# Altium PCB input.PcbDoc
Units mm, origin at the board's own origin, x right, y up, seen from the top; angles counter-clockwise.
Board outline 42 x 44 mm, 2 copper layers (Top Layer, Bottom Layer), stack 1.57 mm thick; 43 components, 24 nets, 128 pads, 46 vias.
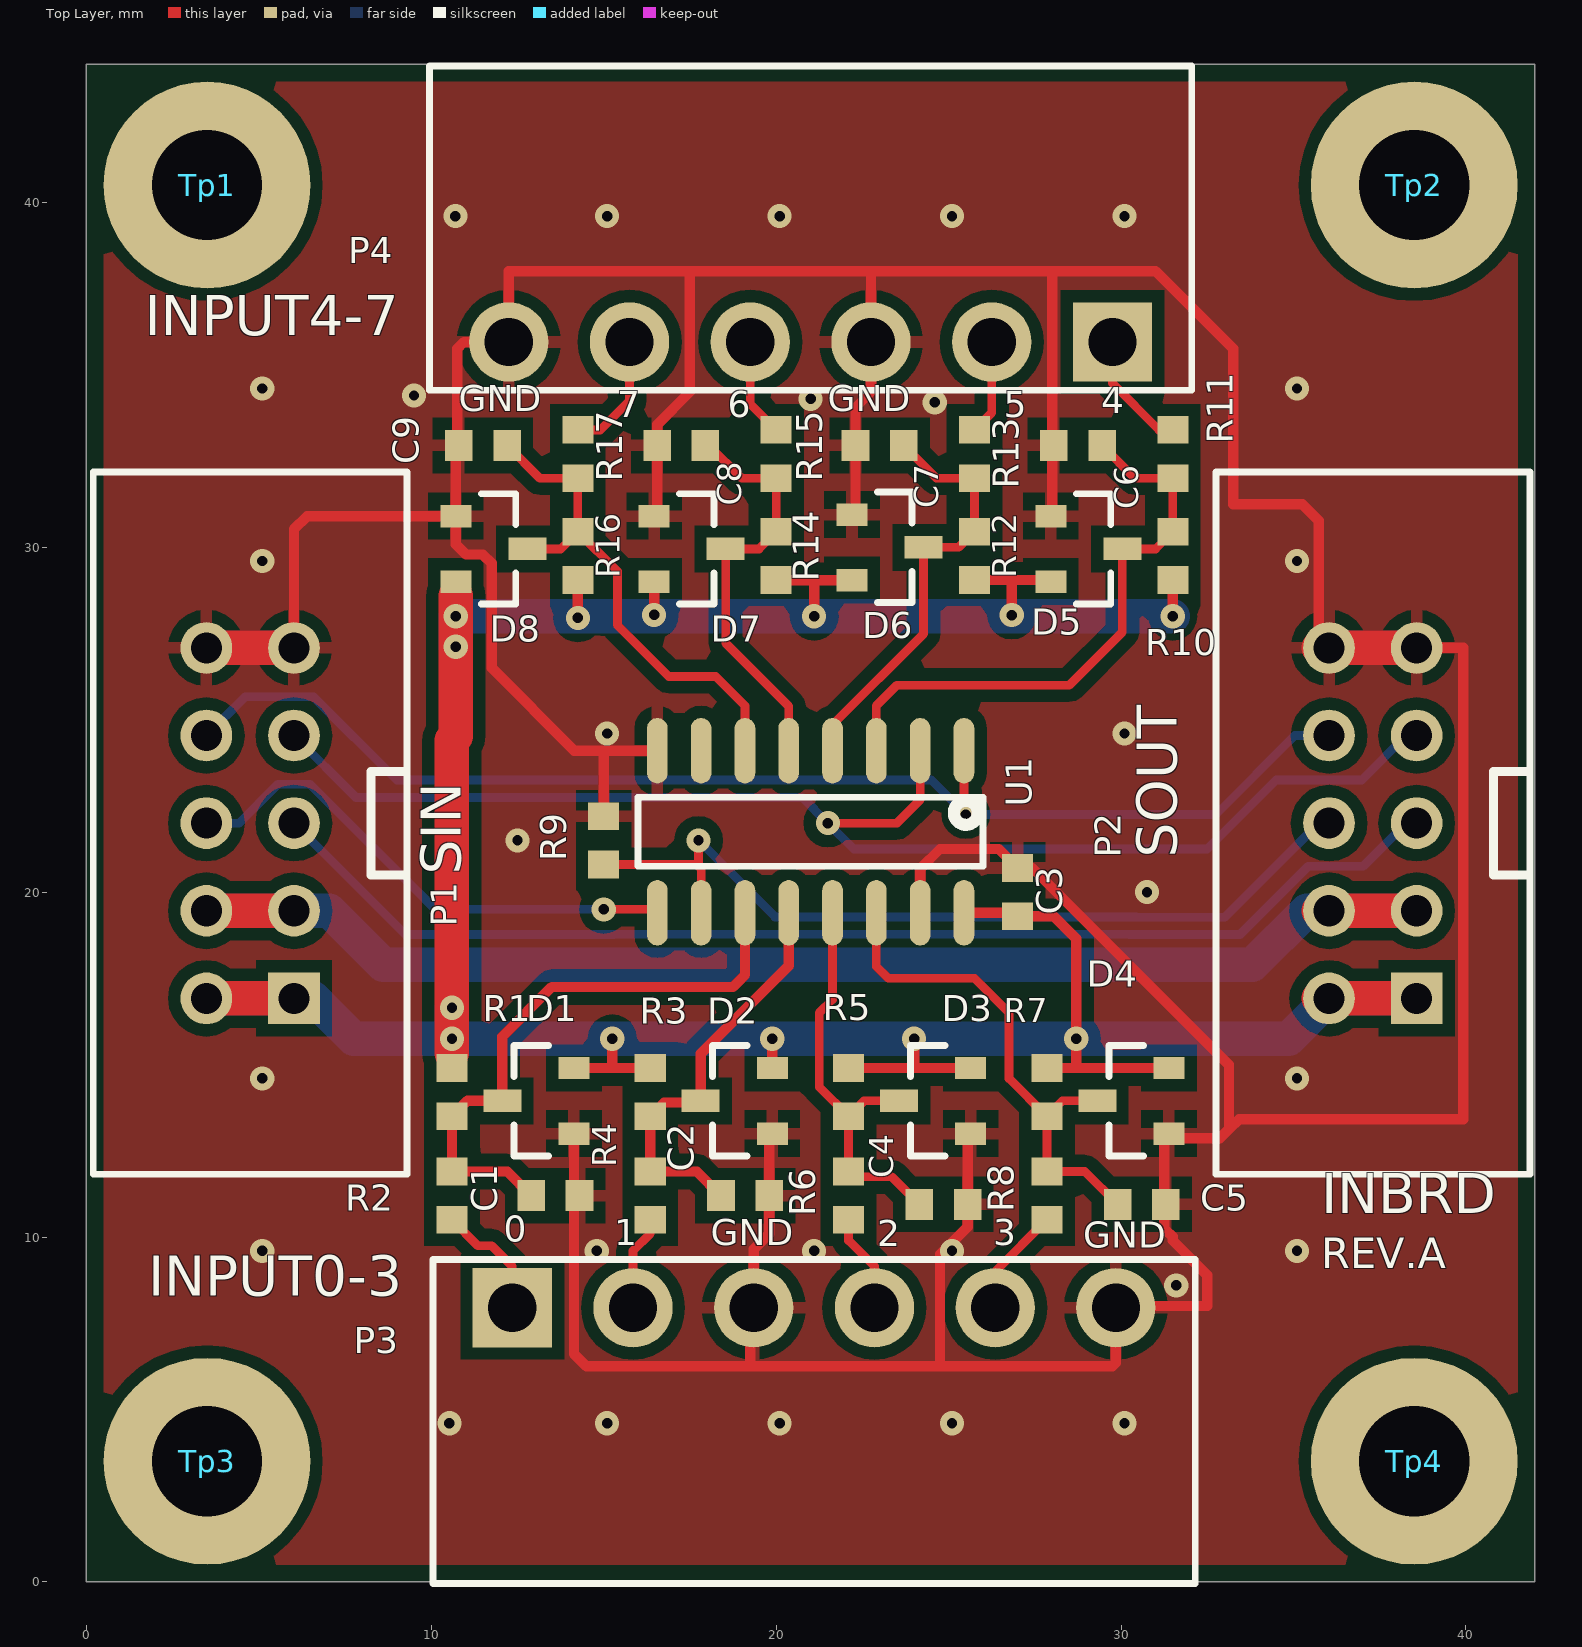
[diagram p0: Top Layer view]
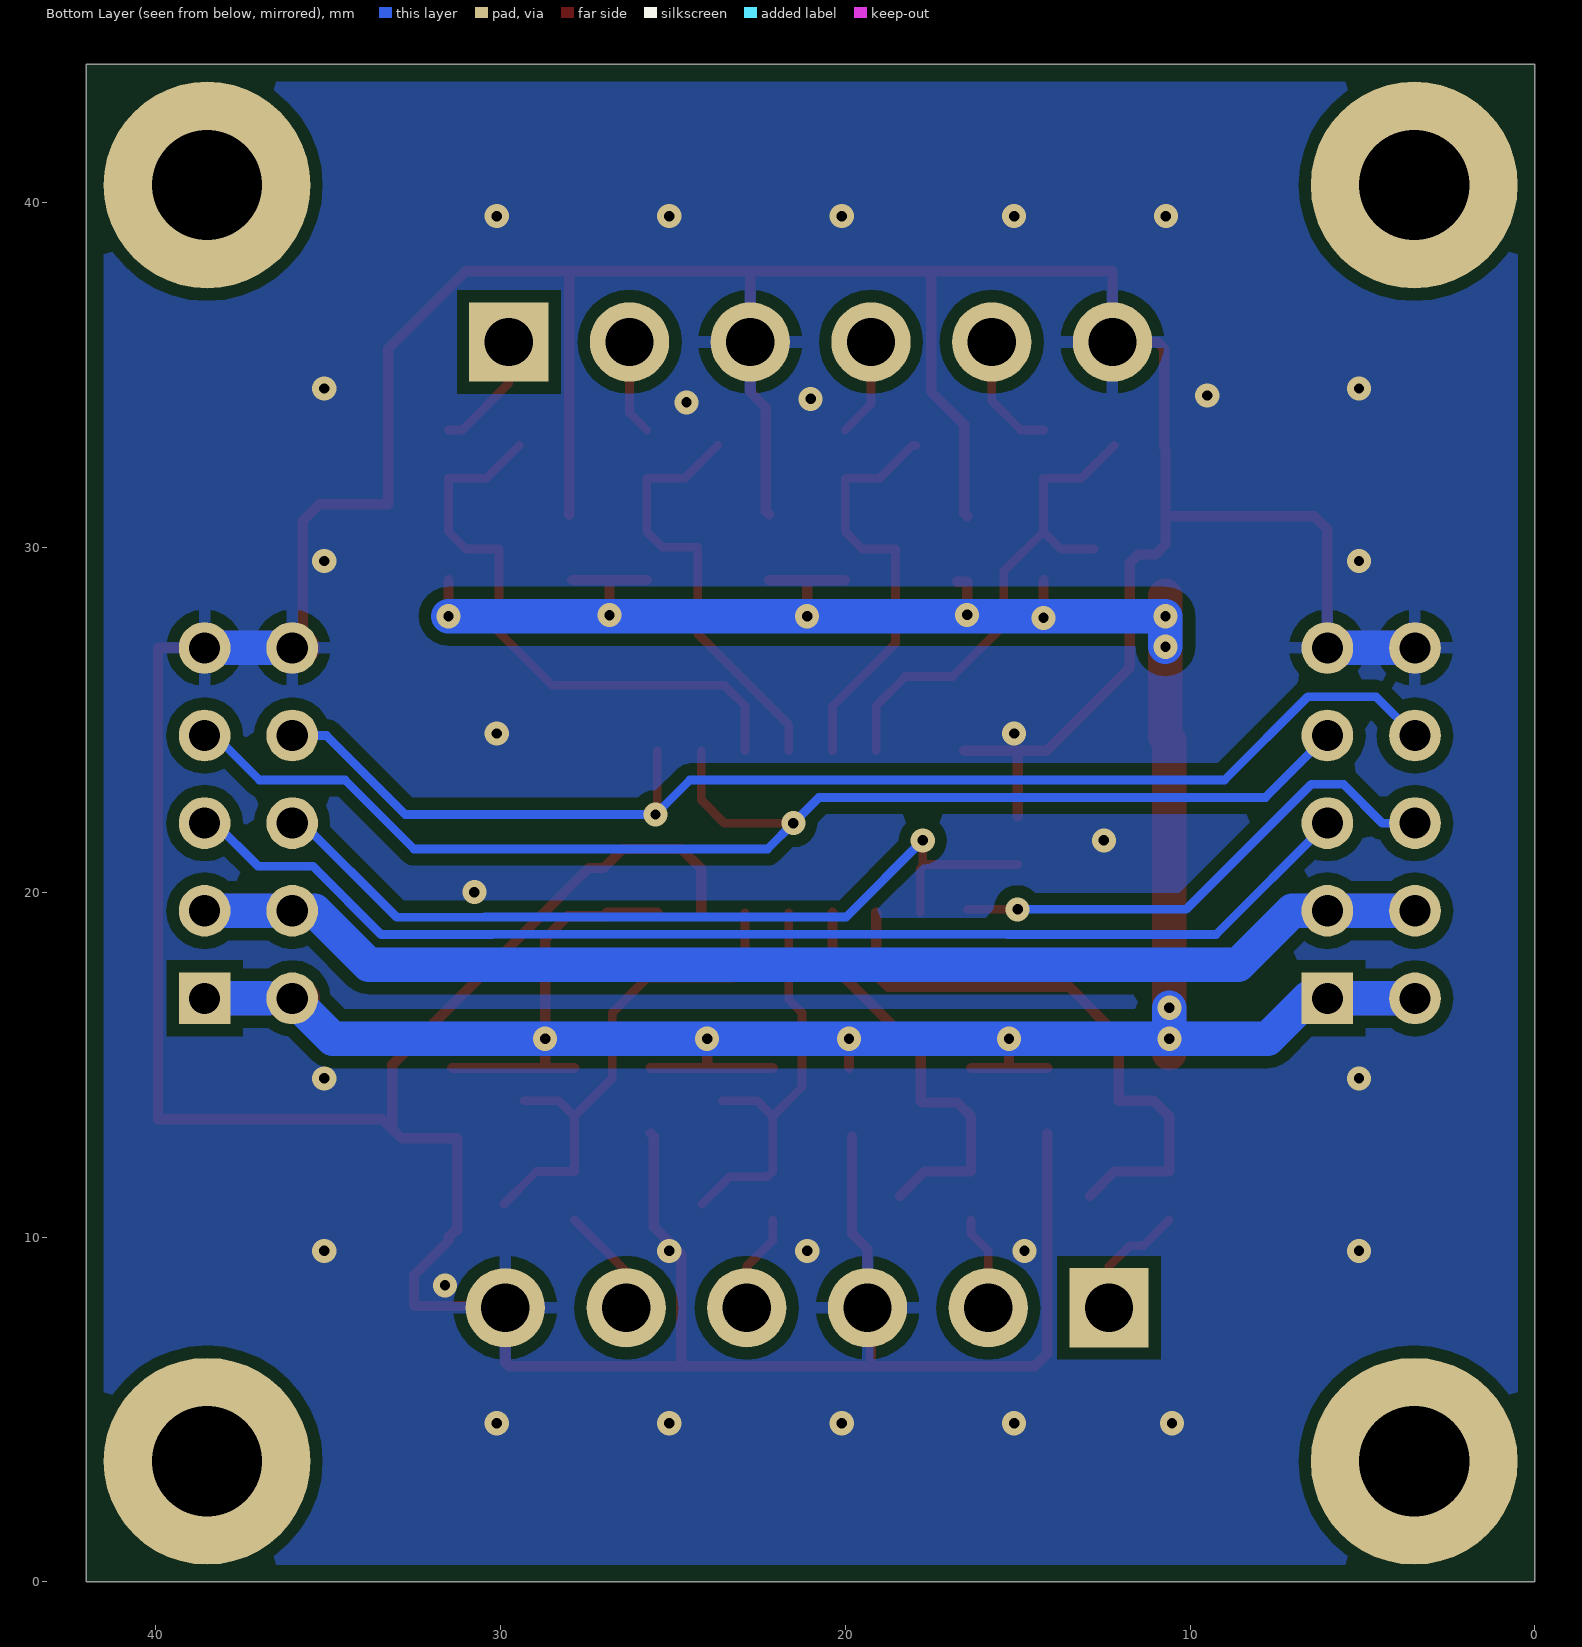
[diagram p1: Bottom Layer view, seen from below]
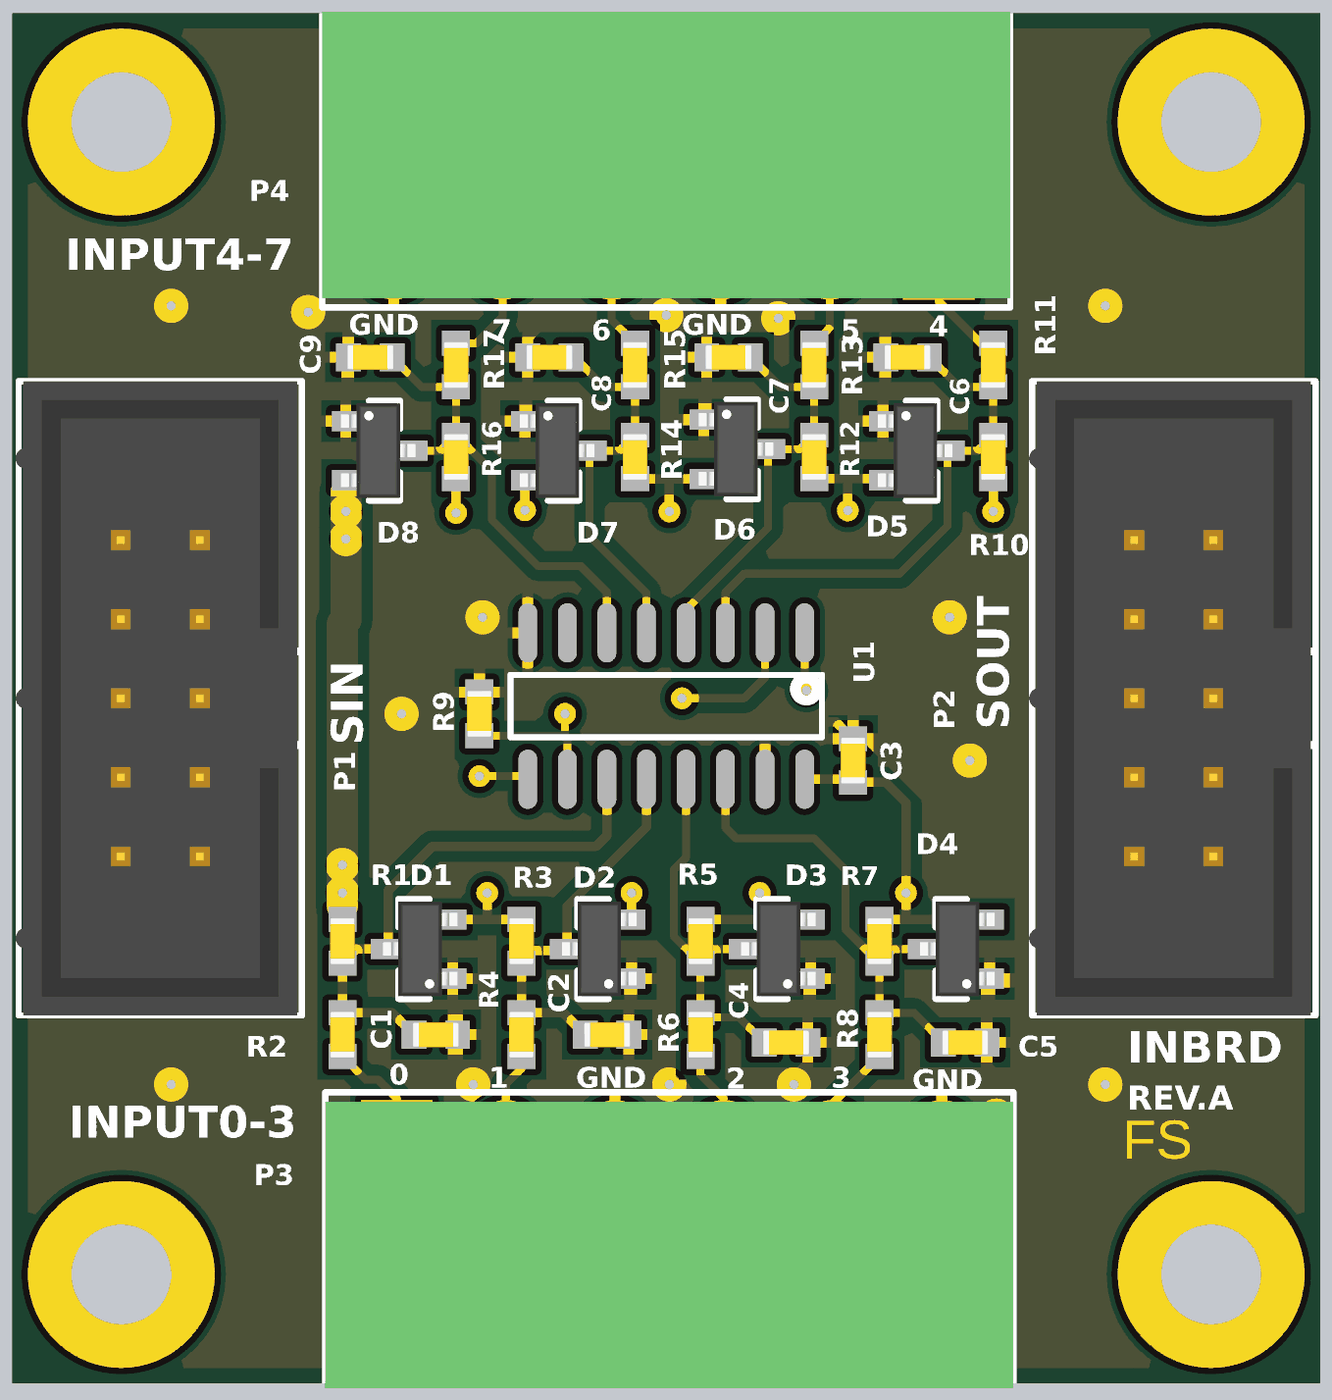
[diagram p2: 3D render of the assembled board from above, using the file's embedded part models]

## Layer stack, top to bottom
Top Solder: solder mask 0.0102, Solder Resist, Dk 3.5
Top Layer: signal copper 0.035
Dielectric1: core 1.5, FR-4, Dk 4.2
Bottom Layer: signal copper 0.035
Bottom Solder: solder mask 0.0102, Solder Resist, Dk 3.5

## Board outline
0,0 42,0 42,44 26.25,44 0,44

## Design rules (kind name [scope] priority, off if disabled: settings)
Clearance [All] p1: gap=0.25 except(0.35: Arc-Poly Track-Poly SMDPad-Poly THPad-Poly Via-Poly Fill-Poly Poly-Poly)
ComponentClearance [All] p1: gap=0.25 collisioncheckmode=3 verticalgap=0.25 showdistances=FALSE
HoleSize [All] p1: absolutevalues=TRUE maxlimit=10 minlimit=0.2 maxpercent=80.000 minpercent=20.000
HoleToHoleClearance [All] p1: gap=0.25 allowstackedmicrovias=TRUE
MinimumSolderMaskSliver [All] p1: minsoldermaskwidth=0.15
PlaneClearance [All] p1: clearance=0.25
PlaneConnect PlaneConnect_via [isvia] p1: planeconnectstyle=Direct reliefexpansion=0.508 reliefentries=2 reliefconductorwidth=0.254 reliefairgap=0.254
PlaneConnect [All] p2: planeconnectstyle=Relief reliefexpansion=0.6 reliefentries=4 reliefconductorwidth=0.35 reliefairgap=0.25
PolygonConnect PolygonConnect_hole [HasFootprint('Hole_M3x6mm')] p1: connectstyle=Direct reliefconductorwidth=0.254 reliefentries=4 polygonreliefangle="90 Angle" airgapwidth=0.254
PolygonConnect PolygonConnect_via [isvia] p2: connectstyle=Direct reliefconductorwidth=0.254 reliefentries=4 polygonreliefangle="90 Angle" airgapwidth=0.254
PolygonConnect [All] p3: connectstyle=Relief reliefconductorwidth=0.35 reliefentries=4 polygonreliefangle="90 Angle" airgapwidth=0.35
RoutingVias [All] p1: holewidth=0.3 width=0.7 viastyle="Through Hole" minholewidth=0.2 minwidth=0.5 maxholewidth=0.5 maxwidth=1
SilkToSilkClearance [All] p1: silktosilkclearance=0.1
SilkToSolderMaskClearance [IsPad] p1: minsilkscreentomaskgap=0.15 clearancetoexposedcopper=TRUE
SolderMaskExpansion SolderMaskExpansion_via [isVia] p1: expansion=-10
SolderMaskExpansion [All] p2: expansion=0.2
Width Width_power [InNet('VCC') Or InNet('GND') or InNet('+12V')] p1: maxlimit=5 minlimit=0.15 preferedwidth=1
Width [All] p2: maxlimit=5 minlimit=0.15 preferedwidth=0.25
22 further rules are at their usual default settings.

## Components (designator, comment, footprint, x,y, rotation, side; value= is the part's Value field where it differs from the comment)
C1 "100nF" 0603_[1608] 13.6,11.2 r180 top
C2 "100nF" 0603_[1608] 19.1,11.2 r180 top
C3 "100nF" 0603_[1608] 27,20 r270 top
C4 "100nF" 0603_[1608] 24.85,10.95 r180 top
C5 "100nF" 0603_[1608] 30.6,10.95 r180 top
C6 "100nF" 0603_[1608] 28.75,32.95 r0 top
C7 "100nF" 0603_[1608] 23,32.95 r0 top
C8 "100nF" 0603_[1608] 17.25,32.95 r0 top
C9 "100nF" 0603_[1608] 11.5,32.95 r0 top
D1 "BAV99" SOT-23 13.1,13.95 r180 top
D2 "BAV99" SOT-23 18.85,13.95 r180 top
D3 "BAV99" SOT-23 24.6,13.95 r180 top
D4 "BAV99" SOT-23 30.35,13.95 r180 top
D5 "BAV99" SOT-23 29,29.95 r0 top
D6 "BAV99" SOT-23 23.237,29.996 r0 top
D7 "BAV99" SOT-23 17.5,29.95 r0 top
D8 "BAV99" SOT-23 11.75,29.95 r0 top
P1 "SER_IN" HEADER_2X5_2.54MM_THD_BOXED 4.75,22 r90 top
P2 "SER_OUT" HEADER_2X5_2.54MM_THD_BOXED 37.3,22 r90 top
P3 "INPUT0-3" TBLOCK_1X6_3.5MM_HOR_THD 21.1,7.95 r0 top
P4 "INPUT4-7" TBLOCK_1X6_3.5MM_HOR_THD 21,35.95 r180 top
R1 "10K" 0603_[1608] 10.6,14.2 r90 top
R2 "330" 0603_[1608] 10.6,11.2 r270 top
R3 "10K" 0603_[1608] 16.35,14.2 r90 top
R4 "330" 0603_[1608] 16.35,11.2 r270 top
R5 "10K" 0603_[1608] 22.1,14.2 r90 top
R6 "330" 0603_[1608] 22.1,11.2 r270 top
R7 "10K" 0603_[1608] 27.85,14.2 r90 top
R8 "330" 0603_[1608] 27.85,11.2 r270 top
R9 "100K" 0603_[1608] 15,21.5 r270 top
R10 "10K" 0603_[1608] 31.5,29.75 r270 top
R11 "330" 0603_[1608] 31.5,32.7 r90 top
R12 "10K" 0603_[1608] 25.75,29.75 r270 top
R13 "330" 0603_[1608] 25.75,32.7 r90 top
R14 "10K" 0603_[1608] 20,29.75 r270 top
R15 "330" 0603_[1608] 20,32.7 r90 top
R16 "10K" 0603_[1608] 14.25,29.75 r270 top
R17 "330" 0603_[1608] 14.25,32.7 r90 top
Tp1 "" Hole_M3x6mm 3.5,40.5 r0 top
Tp2 "" Hole_M3x6mm 38.5,40.5 r0 top
Tp3 "" Hole_M3x6mm 3.5,3.5 r0 top
Tp4 "" Hole_M3x6mm 38.5,3.5 r0 top
U1 "74HC165" SOIC16 21,21.75 r270 top

## Footprints (in the part's own frame and the unit in brackets; to place one, negate y for a bottom-side part, rotate by r counter-clockwise, add the part's x,y. Pads: shape width x height; smd on the part's side, far side on the other; paste and mask are expansions set on the pad)
0603_[1608] [mm] "Chip Capacitor, Body 1.6x0.8mm, IPC High Density"
  rect 0.8x0.9 smd: 1(-0.7,0) 2(0.7,0)
  body extent -0.75,-0.4 0.75,0.4, height 0.67
HEADER_2X5_2.54MM_THD_BOXED [mm] "pin header 2.54mm 2row 10pin boxed"
  rect 1.5x1.5 hole 0.9: 1(-5.08,-1.27)
  round 1.5 hole 0.9: 2(-5.08,1.27) 3(-2.54,-1.27) 4(-2.54,1.27) 5(0,-1.27) 6(0,1.27) 7(2.54,-1.27) 8(2.54,1.27) 9(5.08,-1.27) 10(5.08,1.27)
  silkscreen extent -10.18,-4.55 10.18,4.55, body extent -10.18,-4.4 10.18,4.65, height 8.9
Hole_M3x6mm [mm]
  round 6 hole 3.2 paste-10: 1(0,0)
SOIC16 [mm] "SOIC, 16-Leads, Body 9.9x3.9mm, Pitch 1.27mm, IPC High Density"
  oval 1.9x0.6 smd: 1(-2.35,4.445) 2(-2.35,3.175) 3(-2.35,1.905) 4(-2.35,0.635) 5(-2.35,-0.635) 6(-2.35,-1.905) 7(-2.35,-3.175) 8(-2.35,-4.445) 9(2.35,-4.445) 10(2.35,-3.175) 11(2.35,-1.905) 12(2.35,-0.635) 13(2.35,0.635) 14(2.35,1.905) 15(2.35,3.175) 16(2.35,4.445)
  silkscreen extent -1,-5 1,5, body extent -2,-5 2,5, height 1.91
SOT-23 [mm] "SOT23, 3-Leads, Body 2.9x1.3mm, Pitch 0.95mm, Lead Span 2.5mm, IPC High Density"
  rect 0.9x0.65 smd: 1(-1.038,0.95) 2(-1.038,-0.95)
  rect 1.1x0.65 smd: 3(1.038,0)
  silkscreen extent -0.3,-1.6 0.7,1.6, body extent -1.2,-1.52 1.2,1.52, height 1.22
TBLOCK_1X6_3.5MM_HOR_THD [mm] "3,50mm - PCB Horizontal - 06p"
  rect 2.3x2.3 hole 1.4: 1(-8.75,0)
  round 2.3 hole 1.4: 2(-5.25,0) 3(-1.75,0) 4(1.75,0) 5(5.25,0) 6(8.75,0)
  silkscreen extent -11.05,-8 11.05,1.4, body extent -11.05,-8.1 11.05,1.1, height 7.21

## Part data
C1 C2 C3 C4 C5 C6 C7 C8 C9: library part Cap, "Ceramic X5R 6.3V, 10V"
D1 D2 D3 D4 D5 D6 D7 D8: "SOT23"
P1 P2: library part "Header 5X2", "Header, 5-Pin, Dual row"
P3 P4: library part "Header 6", "Header, 6-Pin"
R1 R2 R3 R4 R5 R6 R7 R8 R9 R10 R11 R12 R13 R14 R15 R16 R17: library part Res1, "Resistor"
Tp1 Tp2 Tp3 Tp4: library part Test_point

## Via types
v1: diameter 0.7, hole 0.3, Top Layer to Bottom Layer, 46 vias

## Nets (pads, with @x,y where several pads share a name; then routed paths per layer and width w, separated by ;. In a path a pad name is that pad's centre, name@x,y a point inside that pad or via, vN(x,y) a via of type N, cw(c..) or ccw(c..) an arc to the next point about the centre after c; other vN are vias at no path point)
+12V: P1.3 P1.4 P2.3 P2.4 | length 41.7
  Top Layer w1: P1.4 P1.3 ; P2.4@35.73,19.46 P2.3@38.27,19.46
  Bottom Layer w1: P1.4 P1.3@6.21,19.46 ; P1.3 P1.3@6.21,19.46 ; P2.4 P2.4@35.73,19.46 ; P2.3@38.27,19.46 P2.4@35.73,19.46 ; P1.3@6.21,19.46 7.04,19.46 8.604,17.896 15.664,17.896 15.668,17.9 29.869,17.9 29.877,17.892 33.808,17.892 35.376,19.46 P2.4@35.73,19.46
GND: C1.1 C2.1 C3.1 C4.1 C5.1 C6.1 C7.1 C8.1 C9.1 D1.1 D2.1 D3.1 D4.1 D5.1 D6.1 D7.1 D8.1 P1.9 P1.10 P2.9 P2.10 P3.3 P3.6 P4.3 P4.6 R9.1 U1.8 U1.15 | length 179.2
  Top Layer w0.3: P1.9 6.02,30.52 6.4,30.9 D8.1 ; 12.25,37.5 P4.6 10.95,35.95 10.75,35.75 10.75,32.9 10.712,32.862 D8.1 ; 12.25,37.5 12.25,38 17.5,38 ; D1.1 14.138,6.612 14.5,6.25 19.25,6.25 ; R9.1 15,24.1 ; D7.1 16.55,30.988 C8.1 16.55,33.55 17.5,34.5 17.5,38 ; U1.8 15,24.1 ; D2.1@19.8,12.912 C2.1 19.8,10.1 19.35,9.65 P3.3 19.25,7.85 19.25,6.25 ; D6.1 22.3,31.046 C7.1 22.3,34.05 22.75,34.5 22.75,38 ; U1.15 24.175,20.675 24.75,21.25 26.45,21.25 C3.1 27.428,20.7 33.127,15 33.127,13.127 ; D3.1 25.55,12.912 C4.1 25.55,10.3 24.75,9.5 24.75,6.25 ; D5.1@28,30.937 28,38 ; 31.25,10.2 31.25,12.863 32.863,12.863 33.127,13.127 ; 31.3,10.2 31.494,10.006 31.494,9.9 32.5,8.894 32.5,8 29.9,8 P3.6 29.85,6.35 29.75,6.25 24.75,6.25 ; P2.10@35.73,27.08 35.73,30.77 35.25,31.25 33.25,31.25 33.25,35.75 31,38 22.75,38 ; P2.9@38.27,27.08 39.92,27.08 39.92,13.42 33.42,13.42 33.127,13.127 ; D8.1 10.712,30.088 11.013,29.787 11.5,29.787 11.75,29.537 11.75,26.5 14.15,24.1 15,24.1 ; 17.5,38 22.75,38 ; 19.25,6.25 24.75,6.25
  Top Layer w1: P1.10 P1.9 ; P2.10@35.73,27.08 P2.9@38.27,27.08
  Bottom Layer w1: P1.10 P1.9 ; P2.10 P2.9@38.27,27.08
  other v1: 10.525,4.6 15.1,4.6 20.1,4.6 25.1,4.6 30.1,4.6 31.6,8.6 5.1,9.6 14.8,9.6 21.1,9.6 25.1,9.6 35.1,9.6 5.1,14.6 35.1,14.6 30.75,20 12.5,21.5 15.1,24.6 30.1,24.6 5.1,29.6 35.1,29.6 24.6,34.2 21,34.3 9.5,34.4 5.1,34.6 35.1,34.6 10.7,39.6 15.1,39.6 20.1,39.6 25.1,39.6 30.1,39.6
NetC1_2: C1.2 D1.3 R1.1 R2.1 U1.11 | length 17.3
  Top Layer w0.3: C1.2 12.2,11.9 R2.1 R1.1 11.05,13.95 D1.3 12.062,15.813 13.5,17.25 18.75,17.25 19.095,17.595 U1.11
NetC2_2: C2.2 D2.3 R3.1 R4.1 U1.12 | length 12.1
  Top Layer w0.3: C2.2 17.7,11.9 R4.1 R3.1 16.75,13.9 17.763,13.9 D2.3 17.812,15.312 20.365,17.865 U1.12
NetC4_2: C4.2 D3.3 R5.1 R6.1 U1.13 | length 12.1
  Top Layer w0.254: U1.13 21.635,16.885 21.25,16.5 21.25,14.35 R5.1 ; D3.3 22.55,13.95 R5.1 ; C4.2 23.35,11.75 22.25,11.75 R6.1 R5.1
NetC5_2: C5.2 D4.3 R7.1 R8.1 U1.14 | length 15.1
  Top Layer w0.254: U1.14 22.905,17.845 23.25,17.5 25.75,17.5 26.75,16.5 26.75,14.6 R7.1 ; D4.3 28.3,13.95 R7.1 ; C5.2 28.95,11.9 R8.1 R7.1
NetC6_2: C6.2 D5.3 R10.1 R11.1 U1.3 | length 17.4
  Top Layer w0.254: U1.3 22.905,25.405 23.5,26 28.5,26 30.038,27.538 D5.3 31,29.95 R10.1 R11.1 30.4,32 C6.2
NetC7_2: C7.2 D6.3 R12.1 R13.1 U1.4 | length 12.6
  Top Layer w0.254: U1.4 21.635,24.848 24.275,27.488 D6.3 25.296,29.996 R12.1 R13.1 24.65,32 C7.2
NetC8_2: C8.2 D7.3 R14.1 R15.1 U1.5 | length 12.3
  Top Layer w0.254: C8.2 18.05,32.95 19,32 R15.1 R14.1 19.5,29.95 D7.3 18.538,27.213 20.365,25.385 U1.5
NetC9_2: C9.2 D8.3 R16.1 R17.1 U1.6 | length 14.8
  Top Layer w0.254: C9.2 13.15,32 R17.1 R16.1 ; D8.3 13.75,29.95 R16.1 ; U1.6 19.095,25.405 18.25,26.25 16.885,26.25 15.4,27.736 15.4,29.3 R16.1
NetP1_5: P1.5 P2.5 | length 34.9
  Bottom Layer w0.254: P1.5 9.247,18.773 15.301,18.773 15.305,18.777 30.232,18.777 30.24,18.769 33.445,18.769 35.426,20.75 37.02,20.75 P2.5@38.27,22
NetP1_6: P1.6 U1.9 | length 14.9
  Top Layer w0.254: v1(15,19.5) U1.9@16.455,19.5
  Bottom Layer w0.254: P1.6 4.426,22 5.553,23.127 6.487,23.127 10.114,19.5 v1(15,19.5)
NetP1_7: P1.7 P2.7 U1.2 | length 39.4
  Top Layer w0.254: v1(21.5,22) 23.5,22 24.175,22.675 U1.2
  Bottom Layer w0.254: P1.7 7.814,22.746 20.754,22.746 v1(21.5,22) 22.25,21.25 24.25,21.25 32.5,21.25 34.5,23.25 36.98,23.25 P2.7@38.27,24.54
NetP1_8: P1.8 P2.8 U1.1 | length 37.3
  Top Layer w0.254: U1.1 25.445,22.305 v1(25.5,22.25)
  Bottom Layer w0.254: P1.8 4.607,25.667 6.583,25.667 9,23.25 24.5,23.25 v1(25.5,22.25) 32.75,22.25 35.04,24.54 P2.8
NetP2_6: P2.6 R9.2 U1.10 | length 24.9
  Top Layer w0.254: R9.2 17.7,20.8 17.75,20.75 ; v1(17.75,21.5) 17.75,20.75 ; U1.10 17.825,20.675 17.75,20.75
  Bottom Layer w0.254: v1(17.75,21.5) 19.969,19.281 30.441,19.281 30.449,19.273 33.003,19.273 P2.6@35.73,22
NetP3_1: P3.1 R2.2 | length 3.5
  Top Layer w0.254: R2.2 11.35,9.75 11.75,9.75 12.35,9.15 P3.1
NetP3_2: P3.2 R4.2 | length 2.8
  Top Layer w0.254: P3.2 15.85,9.6 16.35,10.1 R4.2
NetP3_4: P3.4 R6.2 | length 2.9
  Top Layer w0.254: R6.2 22.1,9.9 22.85,9.15 P3.4
NetP3_5: P3.5 R8.2 | length 3.2
  Top Layer w0.254: P3.5 26.35,9 R8.2
NetP4_1: P4.1 R11.2 | length 3.5
  Top Layer w0.254: P4.1 29.75,34.75 31.1,33.4 R11.2
NetP4_2: P4.2 R13.2 | length 2.8
  Top Layer w0.254: R13.2 26.25,33.9 P4.2
NetP4_4: P4.4 R15.2 | length 3.1
  Top Layer w0.254: P4.4@19.4,35.8 P4.4 19.25,34.15 R15.2
NetP4_5: P4.5 R17.2 | length 3.6
  Top Layer w0.254: R17.2 14.9,33.4 15.75,34.25 P4.5
VCC: C3.2 D1.2 D2.2 D3.2 D4.2 D5.2 D6.2 D7.2 D8.2 P1.1 P1.2 P2.1 P2.2 R1.2 R3.2 R5.2 R7.2 R10.2 R12.2 R14.2 R16.2 U1.16 | length 105.1
  Top Layer w0.3: D1.2 15.25,14.9 ; R16.2 v1(14.25,27.95) v1@14.3,28 ; v1(15.25,15.75) 15.25,14.9 ; R3.2 15.25,14.9 ; v1(16.462,28.038) D7.2 D7.2@16.75,29 ; D2.2 v1(19.888,15.75) ; R14.2@20.004,29.046 21.102,29.046 ; v1(21.102,28) 21.102,29.046 ; R5.2 24,14.9 ; D6.2 21.102,29.046 ; v1(24,15.75) 24,14.9 ; U1.16 C3.2@26.9,19.4 ; D3.2 24,14.9 ; R12.2 26.831,29.05 ; v1@26.7,27.9 v1(26.831,28.031) 26.831,29.05 ; C3.2 28.05,19.3 28.699,18.65 v1(28.699,15.75) 28.699,14.951 ; R7.2 D4.2 ; D5.2@27.913,29.05 26.831,29.05 ; v1(31.5,28) R10.2
  Top Layer w1: P1.2 P1.1 ; 10.6,15.325 v1(10.6,15.75) v1(10.6,16.646) 10.6,24.4 10.712,24.512 v1(10.712,27.112) v1(10.712,28) 10.712,28.588 ; P2.2@35.73,16.92 P2.1@38.27,16.92
  Bottom Layer w1: P1.2 P1.1 6.58,16.92 7.75,15.75 v1(10.6,15.75) ; v1(10.6,16.646) 10.6,16.373 10.6,16.25 v1(10.6,15.75) ; v1(10.712,27.112) v1(10.712,28) v1(21.102,28) v1(31.5,28) ; P2.2 34.86,15.75 v1(28.699,15.75) v1(24,15.75) v1(19.888,15.75) v1(15.25,15.75) v1(10.6,15.75) ; P2.2@36.73,16.92 P2.1@38.27,16.92
pads on no net: Tp1.1 Tp2.1 Tp3.1 Tp4.1 U1.7

## Polygon pours and split planes (outlines as drawn)
GND on Bottom Layer "botgnd" (solid, remove dead copper, pour order 4): 0.5,0.5 41.5,0.5 41.5,43.5 0.5,43.5
GND on Top Layer "topgnd" (solid, remove dead copper, pour order 3): 0.5,0.5 41.5,0.5 41.5,43.5 0.5,43.5

## Silkscreen, mask and mechanical layers (free items; w line width, h text height)
Top Overlay:
  text "INPUT4-7" at 1.7,35.75 h2
  text "GND" at 10.8,33.675 h1.3
  text "GND" at 21.5,33.675 h1.3
  text "4" at 29.425,33.625 h1.3
  text "7" at 15.4,33.5 h1.3
  text "6" at 18.6,33.5 h1.3
  text "5" at 26.6,33.5 h1.3
  text "SOUT" at 32,21 h2 r90
  text "SIN" at 11.25,20.5 h2 r90
  text "INBRD" at 35.8,10.3 h2
  text "0" at 12.1,9.6 h1.3
  text "1" at 15.3,9.5 h1.3
  text "GND" at 18.1,9.5 h1.3
  text "3" at 26.3,9.5 h1.3
  text "2" at 22.925,9.475 h1.3
  text "GND" at 28.9,9.425 h1.3
  text "REV.A" at 35.8,8.8 h1.5
  text "INPUT0-3" at 1.8,7.9 h2
Top Solder:
  text "FS" at 35.65,7.225 h2
Bottom Solder:
  text "FS" at 37.775,7.225 h2
Outline:
  lines w0.2: 0,0 0,44 42,44 42,0 0,0
Drawing:
  circle w0.127: c0.5,0 r1.55
  circle w0.127: c0.5,0 r3
  text "Mechanical Characteristics" at -3.2,47.275 h5
Assembly_top:
  text "Assembly TOP" at 0.378,47.914 h5
Assembly_bot:
  text "Assembly Bottom" at 37.378,47.914 h5
Note_top:
  text "Note TOP" at 3.5,51 h5
Note_bot:
  text "Note Bottom" at 37.278,48.014 h5

## Dimensions
0,0 to 42,0 on Drawing
42,0 to 42,44 on Drawing

## Text inside footprints (layer, text, board x,y; h text height)
U1: Note_top "1" at 25.3,22.95 h1 r270